# EAGLE board LikeJar (EAGLE 6.1)
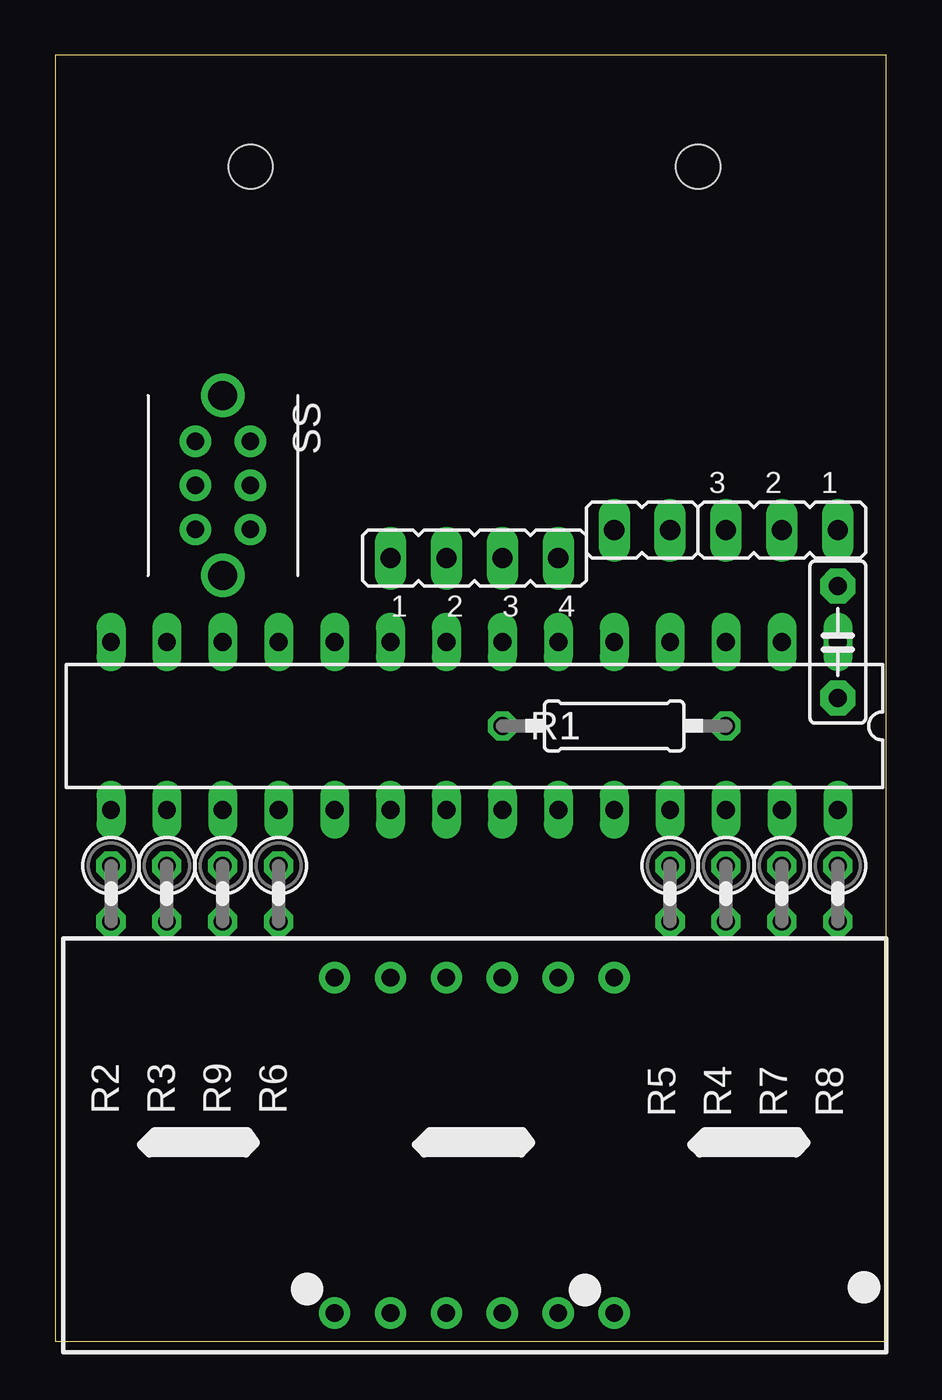
[diagram p0: board, top side]
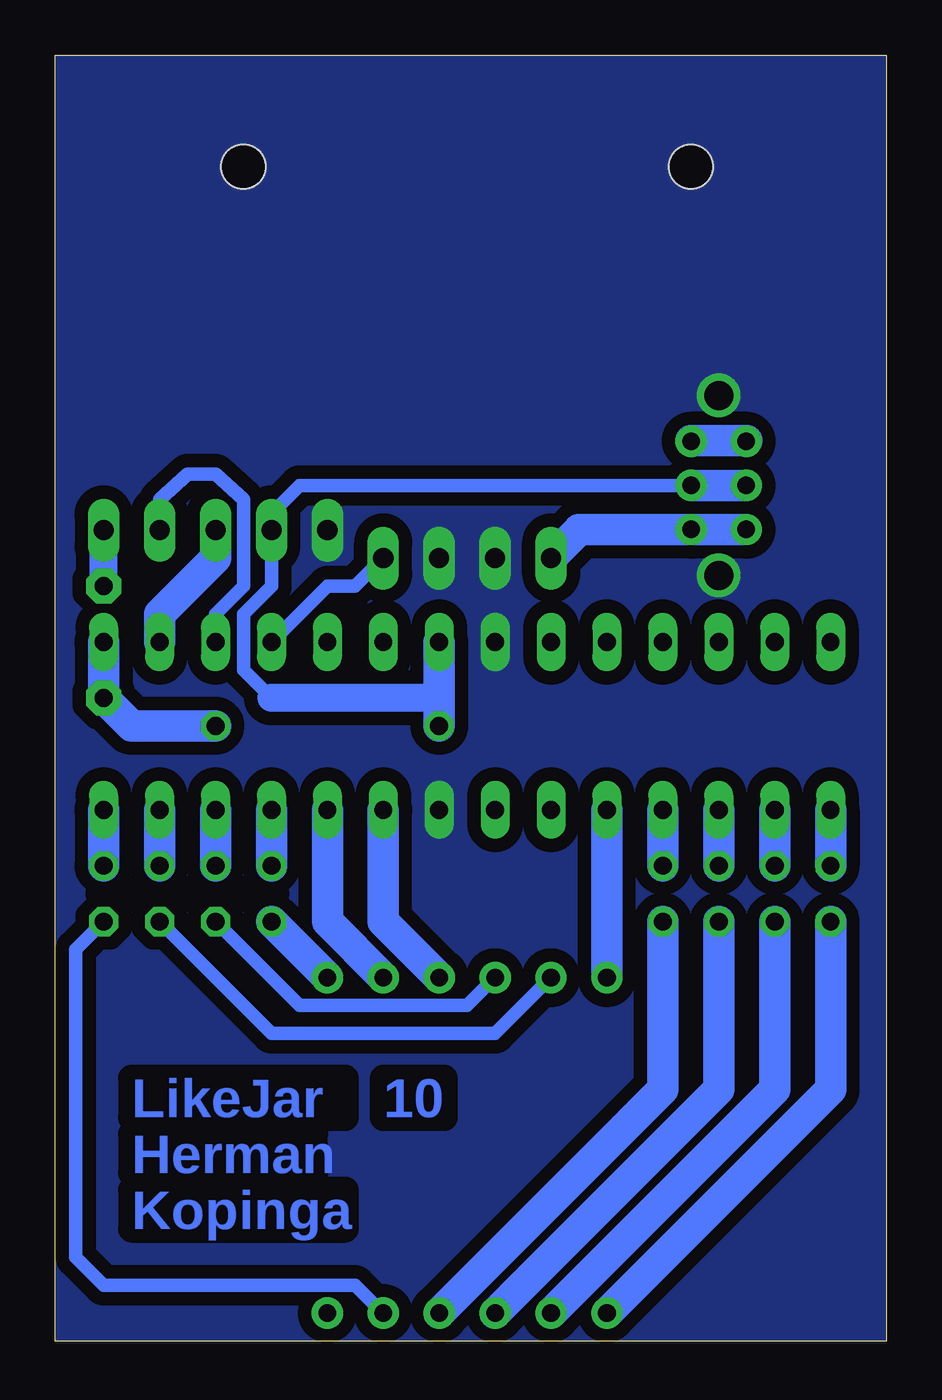
[diagram p1: board, bottom side, seen from below]

Size 37.77 x 58.41 mm. Coordinates in mm from the lower left corner, seen from the top.
Outline: 0,0 37.77,0 37.77,58.41 0,58.41 0,0
Copper layers (1*16): Top 0.035mm / dielectric 1.5mm / Bottom 0.035mm
Design rules: minimum track width 10mil, minimum drill 24mil, track to track 8mil, track to pad 8mil, pad to pad 8mil, via to via 8mil, smd to smd 8mil, copper to edge 0mil, drill to drill 8mil, minimum pad ring 10mil, minimum via ring 8mil, stop-mask expansion 4mil, vias tented up to drill 0mil, thermal gap 10mil
Net classes: 0 default: width 0.61 mm
Holes 2 mm at 8.89,53.34 29.21,53.34
bRestrict: area 27.9,20.3 to 35.6,20.3; area 27.9,20.3 to 34.3,20.3; area 29.2,20.3 to 34.3,20.3; 8 lines

## Footprints (pad centres in the part's own frame; a part is rotated, then mirrored left to right if it is on the bottom)
SS = drill 0.8 pad 1.422: IN1 0,-1.25; IN2 0,1.25; OUT1A -2,-1.25; OUT1B 2,-1.25; OUT2A -2,1.25; OUT2B 2,1.25 | drill 1.316 pad 1.778: P$1 -4.089,0; P$2 4.089,0
C5B2.5 = drill 0.813 pad 1.6 octagon: 1 -2.54,0; 2 2.54,0
DIL28-3 = drill 0.813 long: 1 -16.51,-3.81; 2 -13.97,-3.81; 3 -11.43,-3.81; 4 -8.89,-3.81; 5 -6.35,-3.81; 6 -3.81,-3.81; 7 -1.27,-3.81; 8 1.27,-3.81; 9 3.81,-3.81; 10 6.35,-3.81; 11 8.89,-3.81; 12 11.43,-3.81; 13 13.97,-3.81; 14 16.51,-3.81; 15 16.51,3.81; 16 13.97,3.81; 17 11.43,3.81; 18 8.89,3.81; 19 6.35,3.81; 20 3.81,3.81; 21 1.27,3.81; 22 -1.27,3.81; 23 -3.81,3.81; 24 -6.35,3.81; 25 -8.89,3.81; 26 -11.43,3.81; 27 -13.97,3.81; 28 -16.51,3.81
JP4 = drill 0.914 long: 1 -3.81,0; 2 -1.27,0; 3 1.27,0; 4 3.81,0
JP2 = drill 0.914 long: 1 -2.54,0; 2 0,0; 3 2.54,0
JP1 = drill 0.914 long: 1 0,-1.27; 2 0,1.27
BX56-12 = drill 0.8 pad 1.422: 1 -6.35,-7.62; 2 -3.81,-7.62; 3 -1.27,-7.62; 4 1.27,-7.62; 5 3.81,-7.62; 6 6.35,-7.62; 7 6.35,7.62; 8 3.81,7.62; 9 1.27,7.62; 10 -1.27,7.62; 11 -3.81,7.62; 12 -6.35,7.62
0207/10 = drill 0.813 octagon: 1 -5.08,0; 2 5.08,0
0207/2V = drill 0.813 octagon: 1 -1.27,0; 2 1.27,0

## Placement (x,y rotation side)
ASDF1  SS  [SS]  7.62,38.86 270 top
C3  0,1 uF  [C5B2.5]  35.56,31.75 270 top
IC1  MEGA8-P  [DIL28-3]  19.05,27.94 180 top
JP1  [JP4]  19.05,35.56 0 top
JP5  [JP2]  33.02,36.83 180 top
JP6  [JP1]  26.67,36.83 90 top
LED4  BA56-12SRWA  [BX56-12]  19.05,8.89 0 top
R1  10 kΩ  [0207/10]  25.4,27.94 0 top
R2  120 Ω  [0207/2V]  2.54,20.32 270 top
R3  120 Ω  [0207/2V]  5.08,20.32 270 top
R4  120 Ω  [0207/2V]  30.48,20.32 270 top
R5  120 Ω  [0207/2V]  27.94,20.32 270 top
R6  120 Ω  [0207/2V]  10.16,20.32 270 top
R7  120 Ω  [0207/2V]  33.02,20.32 270 top
R8  120 Ω  [0207/2V]  35.56,20.32 270 top
R9  120 Ω  [0207/2V]  7.62,20.32 270 top

## Library data of the parts
ASDF1 = hk-ss; DOM: ding
C3 = capacitor-wima
IC1 = atmel; OC_FARNELL: unknown; OC_NEWARK: unknown
JP1 JP5 JP6 = jumper
LED4 = display-kingbright; OC_FARNELL: unknown; OC_NEWARK: unknown
R1-R9 = rcl

## Nets
AVCC: IC1.20
GND: ASDF1.P$1 ASDF1.P$2 IC1.8 IC1.22 JP1.2 JP1.3 JP6.2
N$1: ASDF1.IN1 ASDF1.IN2 IC1.7 JP6.1 R1.1
N$3: C3.2 IC1.1 R1.2
N$4: LED4.7 R5.2
N$5: LED4.11 R7.2
N$6: LED4.4 R6.2
N$7: LED4.2 R3.2
N$8: LED4.1 R2.2
N$9: LED4.10 R4.2
N$10: LED4.5 R8.2
N$11: LED4.3 R9.2
N$12: C3.1 JP5.1
N$14: IC1.26 R4.1
N$15: IC1.4 JP1.4
N$16: IC1.23 LED4.9
N$17: IC1.24 LED4.8
N$18: IC1.17 R9.1
N$19: IC1.28 R8.1
N$20: IC1.25 R5.1
N$24: IC1.15 R2.1
N$25: IC1.16 R3.1
N$27: IC1.27 R7.1
N$28: IC1.19 LED4.12
N$29: IC1.18 R6.1
N$30: IC1.3 JP5.2
N$31: IC1.2 JP5.3
VCC: ASDF1.OUT1B ASDF1.OUT2B JP1.1

## Tracks (layer width: path | path; a pad name or v marks a point on that pad's centre or on a via)
GND
  pour Bottom (isolate 0.61, no thermals): 0,44.45 37.77,44.44 37.77,0 0,0
N$1
  Bottom 0.61: 27.94,29.21 29.21,30.48 29.21,33.02 27.94,34.29 JP6.1 27.94,37.59 26.67,38.86 ASDF1.IN2
  Bottom 1.27: 20.32,29.21 27.94,29.21
  Bottom 1.422: IC1.7 20.32,29.21 R1.1 | ASDF1.IN2 ASDF1.IN1
N$2
  pour Bottom (no thermals): 0,58.42 0,43.18 6.6,43.18 6.6,44.45 10.16,44.45 10.16,43.18 27.94,43.18 29.21,40.39 37.77,40.39 37.77,58.42
N$3
  Bottom 1.422: IC1.1 C3.2 34.29,27.94 R1.2
N$4
  Bottom 1.422: LED4.7 R5.2
N$5
  Bottom 0.61: LED4.11 17.78,13.97 27.94,13.97 R7.2
N$6
  Bottom 1.422: LED4.4 10.16,11.43 R6.2
N$7
  Bottom 1.422: R3.2 5.08,11.43 LED4.2
N$8
  Bottom 1.422: LED4.1 2.54,11.43 R2.2
N$9
  Bottom 0.61: LED4.10 19.05,15.24 26.67,15.24 R4.2
N$10
  Bottom 0.61: R8.2 36.83,17.78 36.83,3.81 35.56,2.54 24.13,2.54 LED4.5
N$11
  Bottom 1.422: R9.2 7.62,11.43 LED4.3
N$12
  Bottom 1.27: C3.1 JP5.1
N$13
  Bottom 1.422: 6.35,40.89 8.89,40.89
N$14
  Bottom 1.422: IC1.26 R4.1
N$15
  Bottom 0.61: IC1.4 25.4,34.29 24.13,34.29 JP1.4
N$16
  Bottom 1.422: LED4.9 22.86,19.05 IC1.23
N$17
  Bottom 1.422: LED4.8 25.4,19.05 IC1.24
N$18
  Bottom 1.422: IC1.17 R9.1
N$19
  Bottom 1.422: IC1.28 R8.1
N$20
  Bottom 1.422: R5.1 IC1.25
N$21
  pour Bottom (no thermals): 0,29.21 17.78,29.21 17.78,26.67 0,26.67
N$24
  Bottom 1.422: IC1.15 R2.1
N$25
  Bottom 1.422: IC1.16 R3.1
N$27
  Bottom 1.422: IC1.27 R7.1
N$28
  Bottom 1.422: LED4.12 IC1.19
N$29
  Bottom 1.422: IC1.18 R6.1
N$30
  Bottom 0.61: IC1.3 30.48,33.02 29.21,34.29 29.21,38.23 30.48,39.37 31.75,39.37 33.02,38.23 JP5.2
N$31
  Bottom 1.422: JP5.3 30.48,35.56 33.02,33.02 IC1.2
VCC
  Bottom 1.422: ASDF1.OUT1B ASDF1.OUT2B 13.97,36.86 13.97,36.83 JP1.1

## Text on the board
Bottom: 10 | LikeJar | Herman | Kopinga
bRestrict: + | - | b | b | Jar | Like